# Altium PCB LM35.PcbDoc
Units mm, origin at the board's own origin, x right, y up, seen from the top; angles counter-clockwise.
Board outline 31.95 x 23.94 mm, 2 copper layers (Top Layer, Bottom Layer); 8 components, 4 nets, 14 pads, 48 vias.
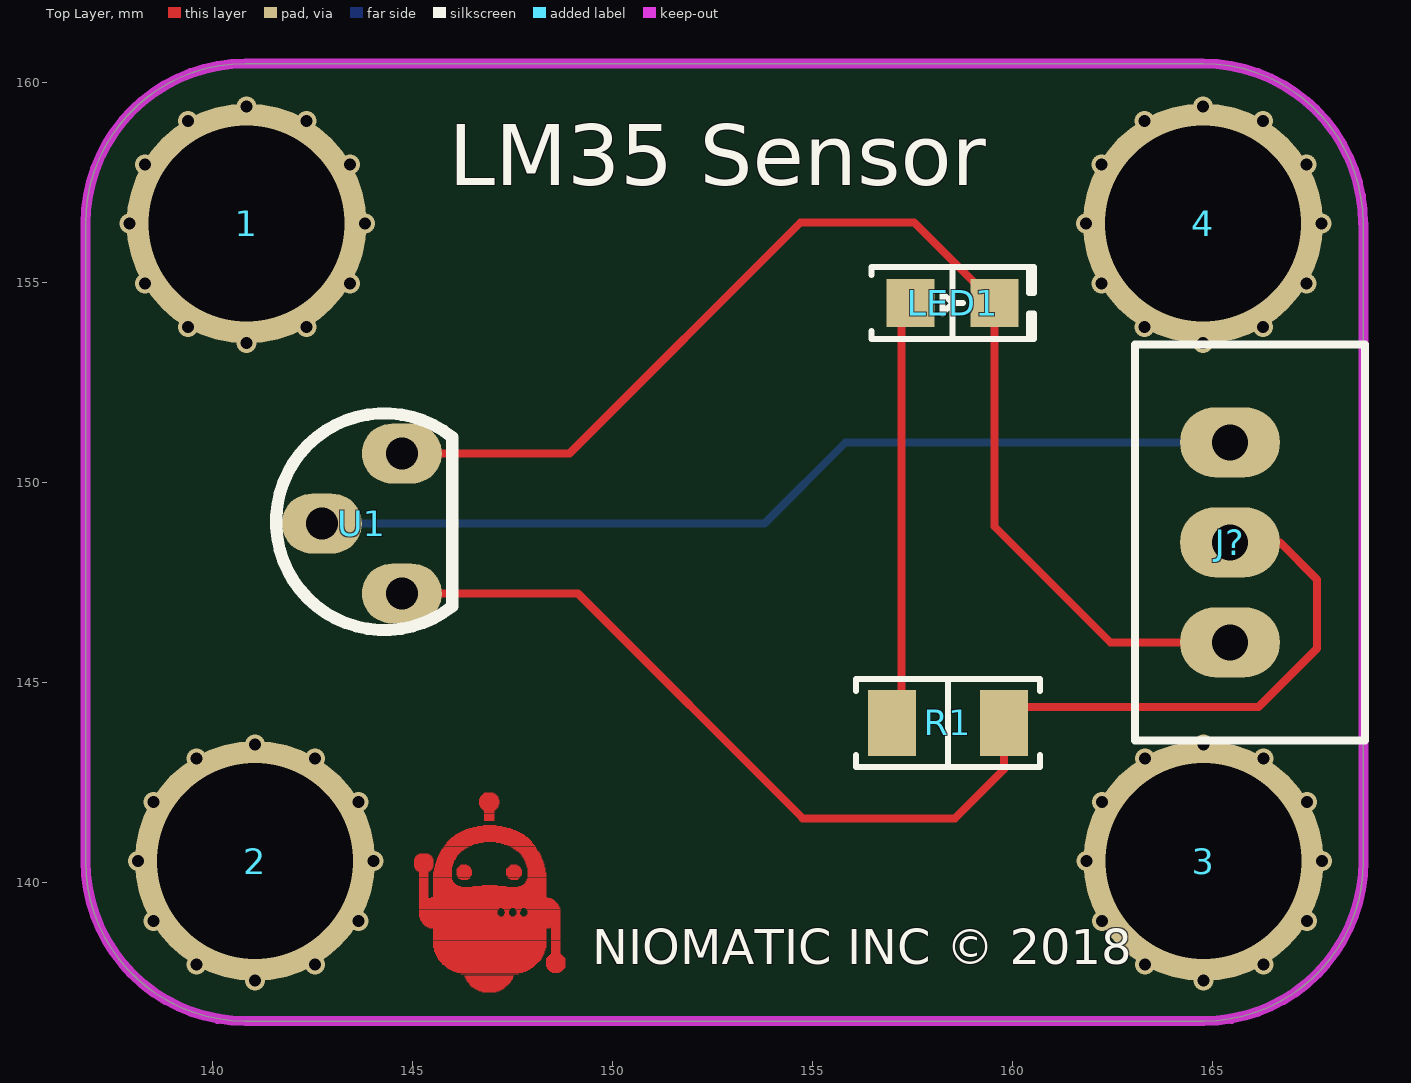
[diagram p0: Top Layer view]
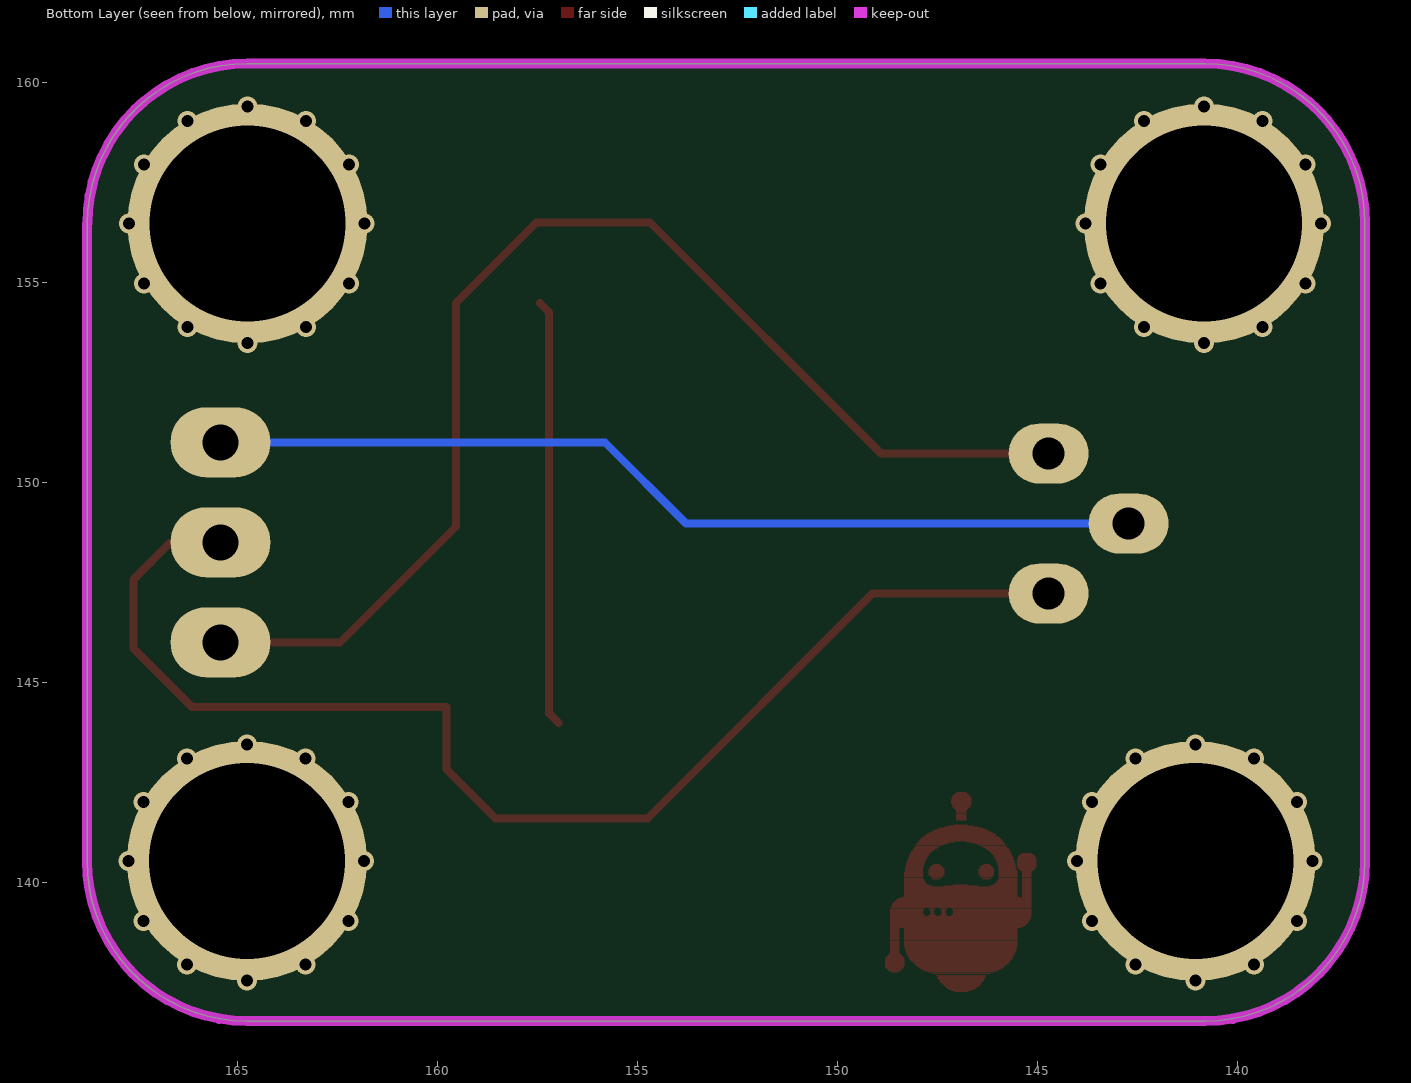
[diagram p1: Bottom Layer view, seen from below]
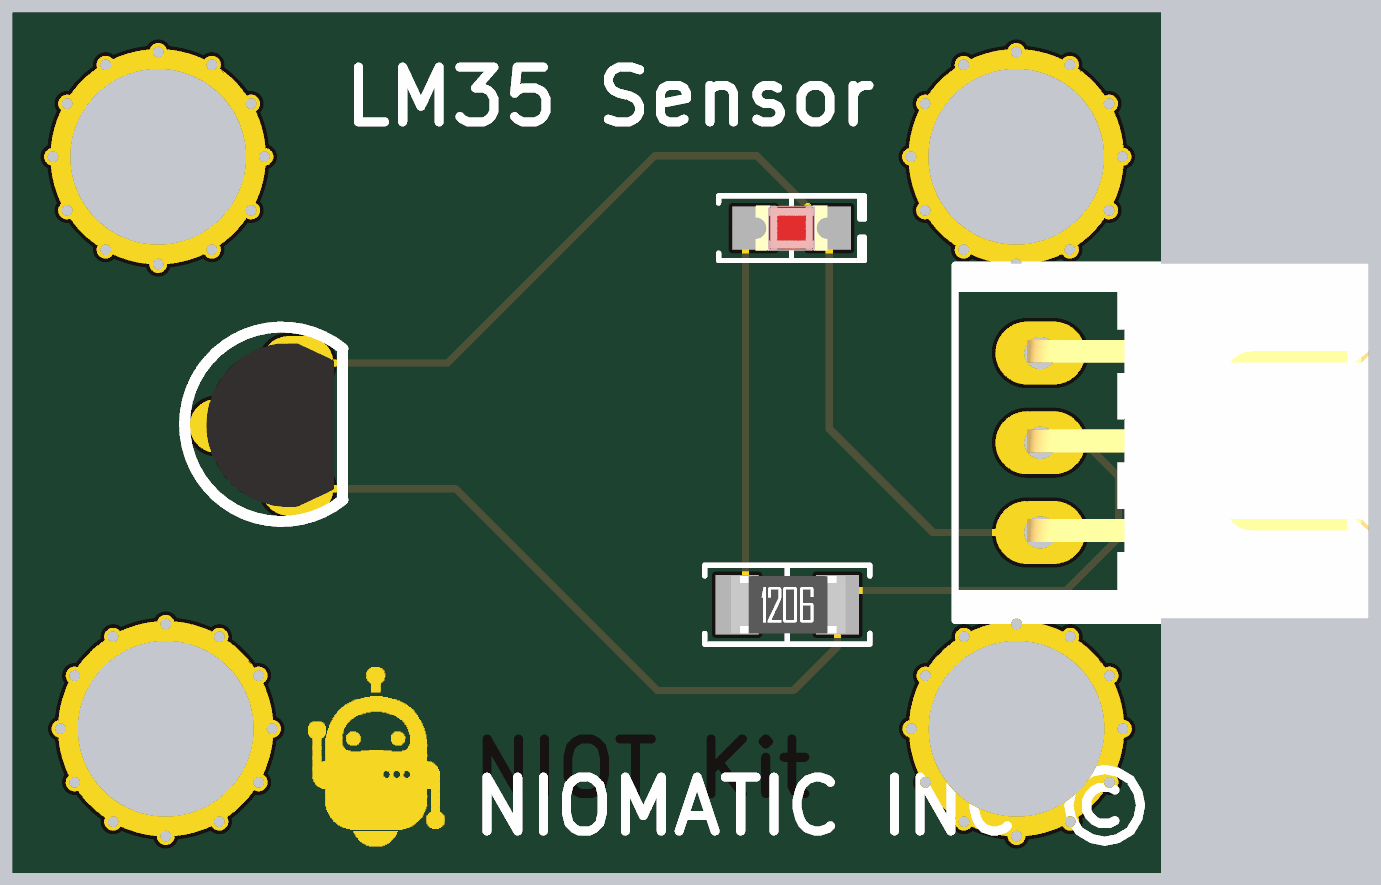
[diagram p2: 3D render of the assembled board from above, using the file's embedded part models]

## Layer stack, top to bottom
Top Solder: solder mask 0.0102, Solder Resist, Dk 3.5
Top Layer: signal copper 0.0356
Dielectric 1: dielectric 0.32, FR-4, Dk 4.8
Bottom Layer: signal copper 0.0356
Bottom Solder: solder mask 0.0102, Solder Resist, Dk 3.5

## Board outline
136.821,140.53 ccw(c140.821,140.53) 140.821,136.53 164.77,136.53 ccw(c164.77,140.53) 168.77,140.53 168.77,156.47 168.761,156.47 ccw(c164.761,156.47) 164.761,160.47 140.821,160.47 ccw(c140.821,156.47) 136.821,156.47 136.821,156.45

## Design rules (kind name [scope] priority, off if disabled: settings)
Clearance [All] p1: gap=0.254 ignorepadtopadclearanceinfootprint=FALSE except(0: Arc-Hole Track-Hole SMDPad-Hole THPad-Hole Via-Hole Fill-Hole Poly-Hole Region-Hole Text-Hole)
PolygonConnect [All] p1: connectstyle=Relief reliefconductorwidth=0.254 reliefentries=4 polygonreliefangle="90 Angle" airgapwidth=0.254
RoomDefinition LM35 [InComponentClass('LM35')] p1: confinementstyle=ConfineIn formatcopy=TRUE lockcomponents=FALSE outline 178.943,26.924 198.247,26.924 198.247,44.577 178.943,44.577
RoutingVias [All] p1: holewidth=0.2 width=0.5 viastyle="Through Hole" minholewidth=0.2 minwidth=0.5 maxholewidth=0.2 maxwidth=0.5
SolderMaskExpansion [All] p1: expansion=0.102
Width [All] p1: maxlimit=0.2 minlimit=0.2 preferedwidth=0.2
30 further rules are at their usual default settings.

## Components (designator, comment, footprint, x,y, rotation, side; value= is the part's Value field where it differs from the comment)
1 "Lego" "Lego Hole" 140.85,156.47 r90 top
2 "Lego" "Lego Hole" 141.06,140.53 r90 top
3 "Lego" "Lego Hole" 164.771,140.53 r90 top
4 "Lego" "Lego Hole" 164.761,156.47 r90 top
J? "Header" "JST XH B3B-XH-A - RIGHT" 165.433,148.5 r90 top
LED1 "RED" "LED 0805/2012 RED" 158.5,154.48 r0 top value=Green
R1 "1K" "RES 1206/3216" 158.382,143.987 r0 top
U1 "LM35" LM35 144.48,147.72 r180 top

## Footprints (in the part's own frame and the unit in brackets; to place one, negate y for a bottom-side part, rotate by r counter-clockwise, add the part's x,y. Pads: shape width x height; smd on the part's side, far side on the other; paste and mask are expansions set on the pad)
"JST XH B3B-XH-A - RIGHT" [mm]
  oval 1.75x2.5 hole 0.9: 1(-2.5,0) 2(0,0) 3(2.5,0)
  silkscreen extent -4.95,-3.38 4.95,2.38, body extent -4.9,-9.15 5,2.35, height 6.1
"LED 0805/2012 RED" [mm] "Chip Diode, 2-Leads, Body 2.00x1.25mm, IPC Medium Density"
  rect 1.2x1.2 smd: 1(-1.05,0) 2(1.05,0)
  silkscreen extent -2.03,-0.9 2.03,0.9, body extent -1,-0.62 1,0.63, height 0.9
"Lego Hole" [mm]
  round 6 hole 4.9: 0(0,0)
LM35 [mm]
  oval 2x1.5 hole 0.8: 1(-0.25,0.5) 2(1.75,-1.25) 3(-0.25,-3)
  silkscreen extent -1.52,-4 2.89,1.41, body extent -1.27,-3.56 2.29,1.02, height 6.18
"RES 1206/3216" [mm] "Chip Resistor, 2-Leads, Body 3.13x1.55mm, IPC Medium Density"
  rect 1.2x1.65 smd: 1(-1.4,0) 2(1.4,0)
  silkscreen extent -2.3,-1.1 2.3,1.1, body extent -1.57,-0.8 1.62,0.8, height 0.6

## Part data
J?: library part "3 Pin"
LED1: library part LED, "Chip LED"
R1: library part Resistor, "SMT Resistor"
U1: "LM35 Temperature Sensor", ComponentLinkURL=www.picpars.com, Designer="Seyed Mohsen Ghasemain", E-mail=picpars@gmail.com

## Via types
v1: diameter 0.5, hole 0.3, Top Layer to Bottom Layer, 48 vias

## Nets (pads, with @x,y where several pads share a name; then routed paths per layer and width w, separated by ;. In a path a pad name is that pad's centre, name@x,y a point inside that pad or via, vN(x,y) a via of type N, cw(c..) or ccw(c..) an arc to the next point about the centre after c; other vN are vias at no path point)
AOUT: J?.3 U1.2 | length 23.5
  Bottom Layer w0.2: U1.2 153.796,148.97 155.826,151 J?.3
GND: J?.1 LED1.2 U1.3 | length 30.7
  Top Layer w0.2: U1.3 148.92,150.72 154.7,156.5 157.53,156.5 LED1.2 159.55,148.89 162.44,146 J?.1
NetLED1_1: LED1.1 R1.1 | length 10.7
  Top Layer w0.2: R1.1 157.22,144.225 157.22,154.25 LED1.1
VCC: J?.2 R1.2 U1.1 | length 32.2
  Top Layer w0.2: U1.1 149.13,147.22 154.75,141.6 158.558,141.6 159.782,142.824 R1.2 159.782,144.38 166.148,144.38 167.61,145.842 167.61,147.57 166.68,148.5 J?.2
pads on no net: 1.0 2.0 3.0 4.0
copper on no net: | length 380
  Top Layer w0.025: 145.034,140.387 145.516,140.387 ; 145.034,140.412 145.516,140.412 ; 145.034,140.438 145.516,140.438 ; 145.034,140.463 145.516,140.463 ; 145.034,140.489 145.516,140.489 ; 145.034,140.514 145.516,140.514 ; 145.034,140.539 145.516,140.539 ; 145.034,140.565 145.516,140.565 ; 145.034,140.59 145.516,140.59 ; 145.059,140.336 145.491,140.336 ; 145.059,140.362 145.491,140.362 ; 145.059,140.616 145.491,140.616 ; 145.059,140.641 145.491,140.641 ; 145.085,140.311 145.466,140.311 ; 145.085,140.666 145.466,140.666 ; 145.11,140.285 145.44,140.285 ; 145.11,140.692 145.44,140.692 ; 145.161,139.142 148.691,139.142 ; 145.161,139.168 147.167,139.168 ; 145.161,139.193 147.142,139.193 ; 145.161,139.219 147.117,139.219 ; 145.161,139.244 147.117,139.244 ; 145.161,139.269 147.117,139.269 ; 145.161,139.295 147.117,139.295 ; 145.161,139.32 147.142,139.32 ; 145.161,139.346 147.167,139.346 ; 145.161,139.371 148.666,139.371 ; 145.161,139.396 148.666,139.396 ; 145.161,139.422 148.641,139.422 ; 145.161,139.447 148.641,139.447 ; 145.161,139.473 148.615,139.473 ; 145.161,139.498 148.59,139.498 ; 145.161,139.523 148.564,139.523 ; 145.161,139.549 148.539,139.549 ; 145.161,139.574 148.514,139.574 ; 145.161,139.6 148.463,139.6 ; 145.161,139.625 145.389,139.625 ; 145.161,139.65 145.389,139.65 ; 145.161,139.676 145.389,139.676 ; 145.161,139.701 145.389,139.701 ; 145.161,139.727 145.389,139.727 ; 145.161,139.752 145.389,139.752 ; 145.161,139.777 145.389,139.777 ; 145.161,139.803 145.389,139.803 ; 145.161,139.828 145.389,139.828 ; 145.161,139.854 145.389,139.854 ; 145.161,139.879 145.389,139.879 ; 145.161,139.904 145.389,139.904 ; 145.161,139.93 145.389,139.93 ; 145.161,139.955 145.389,139.955 ; 145.161,139.981 145.389,139.981 ; 145.161,140.006 145.389,140.006 ; 145.161,140.031 145.389,140.031 ; 145.161,140.057 145.389,140.057 ; 145.161,140.082 145.389,140.082 ; 145.161,140.108 145.389,140.108 ; 145.161,140.133 145.389,140.133 ; 145.161,140.158 145.389,140.158 ; 145.161,140.184 145.389,140.184 ; 145.161,140.209 145.389,140.209 ; 145.161,140.235 145.389,140.235 ; 145.161,140.26 145.389,140.26 ; 145.161,140.717 145.389,140.717 ; 145.186,139.066 148.691,139.066 ; 145.186,139.092 148.691,139.092 ; 145.186,139.117 148.691,139.117 ; 145.212,139.041 148.691,139.041 ; 145.237,138.99 148.691,138.99 ; 145.237,139.015 148.691,139.015 ; 145.262,138.965 148.691,138.965 ; 145.288,138.939 148.691,138.939 ; 145.313,138.914 148.691,138.914 ; 145.364,138.888 148.691,138.888 ; 145.415,138.863 148.437,138.863 ; 145.466,139.625 148.361,139.625 ; 145.516,138.38 148.336,138.38 ; 145.516,138.406 148.336,138.406 ; 145.516,138.431 148.336,138.431 ; 145.516,138.457 148.336,138.457 ; 145.516,138.482 148.336,138.482 ; 145.516,138.507 148.336,138.507 ; 145.516,138.533 148.336,138.533 ; 145.516,138.558 148.336,138.558 ; 145.516,138.584 148.336,138.584 ; 145.516,138.609 148.336,138.609 ; 145.516,138.634 148.336,138.634 ; 145.516,138.66 148.336,138.66 ; 145.516,138.685 148.336,138.685 ; 145.516,138.711 148.336,138.711 ; 145.516,138.736 148.336,138.736 ; 145.516,138.761 148.336,138.761 ; 145.516,138.787 148.336,138.787 ; 145.516,138.812 148.336,138.812 ; 145.516,138.838 148.336,138.838 ; 145.516,139.65 148.336,139.65 ; 145.516,139.676 148.336,139.676 ; 145.516,139.701 148.336,139.701 ; 145.516,139.727 148.336,139.727 ; 145.516,139.752 148.336,139.752 ; 145.516,139.777 148.336,139.777 ; 145.516,139.803 148.336,139.803 ; 145.516,139.828 148.336,139.828 ; 145.516,139.854 148.336,139.854 ; 145.516,139.879 148.336,139.879 ; 145.516,139.904 146.202,139.904 ; 145.516,139.93 146.126,139.93 ; 145.516,139.955 146.075,139.955 ; 145.516,139.981 146.05,139.981 ; 145.516,140.006 146.024,140.006 ; 145.516,140.031 145.999,140.031 ; 145.516,140.057 145.999,140.057 ; 145.516,140.082 145.974,140.082 ; 145.516,140.108 145.974,140.108 ; 145.516,140.133 145.974,140.133 ; 145.516,140.158 145.974,140.158 ; 145.516,140.184 145.974,140.184 ; 145.516,140.209 145.974,140.209 ; 145.516,140.235 145.974,140.235 ; 145.516,140.26 145.974,140.26 ; 145.542,138.279 148.285,138.279 ; 145.542,138.304 148.31,138.304 ; 145.542,138.33 148.31,138.33 ; 145.542,138.355 148.31,138.355 ; 145.542,140.285 145.974,140.285 ; 145.542,140.311 145.974,140.311 ; 145.542,140.336 145.974,140.336 ; 145.542,140.362 145.974,140.362 ; 145.567,138.228 148.285,138.228 ; 145.567,138.253 148.285,138.253 ; 145.567,140.387 145.974,140.387 ; 145.567,140.412 145.999,140.412 ; 145.567,140.438 145.999,140.438 ; 145.567,140.463 145.999,140.463 ; 145.593,138.177 148.26,138.177 ; 145.593,138.203 148.26,138.203 ; 145.593,140.489 146.024,140.489 ; 145.593,140.514 146.024,140.514 ; 145.593,140.539 146.024,140.539 ; 145.618,138.126 148.234,138.126 ; 145.618,138.152 148.234,138.152 ; 145.618,140.565 146.05,140.565 ; 145.618,140.59 146.075,140.59 ; 145.618,140.616 146.075,140.616 ; 145.643,138.076 148.209,138.076 ; 145.643,138.101 148.209,138.101 ; 145.643,140.641 146.101,140.641 ; 145.643,140.666 146.101,140.666 ; 145.669,138.05 148.183,138.05 ; 145.669,140.692 146.126,140.692 ; 145.669,140.717 146.151,140.717 ; 145.694,138.025 148.158,138.025 ; 145.694,140.743 146.177,140.743 ; 145.694,140.768 146.202,140.768 ; 145.72,137.999 148.133,137.999 ; 145.72,140.793 146.228,140.793 ; 145.72,140.819 146.278,140.819 ; 145.745,137.949 148.082,137.949 ; 145.745,137.974 148.107,137.974 ; 145.745,140.844 146.304,140.844 ; 145.77,140.87 146.355,140.87 ; 145.77,140.895 146.405,140.895 ; 145.796,137.923 148.056,137.923 ; 145.796,140.92 146.482,140.92 ; 145.821,137.898 148.031,137.898 ; 145.821,140.946 146.532,140.946 ; 145.847,137.872 148.006,137.872 ; 145.847,140.971 146.634,140.971 ; 145.847,140.997 146.761,140.997 ; 145.872,137.847 147.955,137.847 ; 145.872,141.022 147.98,141.022 ; 145.897,141.047 147.955,141.047 ; 145.923,137.822 147.929,137.822 ; 145.923,141.073 147.929,141.073 ; 145.948,141.098 147.904,141.098 ; 145.974,137.796 147.879,137.796 ; 145.974,141.124 147.879,141.124 ; 146.024,137.771 147.828,137.771 ; 146.024,141.149 147.828,141.149 ; 146.05,141.174 147.802,141.174 ; 146.075,141.2 147.777,141.2 ; 146.101,137.745 147.752,137.745 ; 146.101,140.184 146.482,140.184 ; 146.101,140.209 146.482,140.209 ; 146.101,140.235 146.482,140.235 ; 146.101,140.26 146.482,140.26 ; 146.101,140.285 146.482,140.285 ; 146.101,140.311 146.482,140.311 ; 146.101,140.336 146.456,140.336 ; 146.126,140.133 146.431,140.133 ; 146.126,140.158 146.456,140.158 ; 146.126,140.362 146.456,140.362 ; 146.126,141.225 147.726,141.225 ; 146.151,140.108 146.431,140.108 ; 146.151,140.387 146.431,140.387 ; 146.177,140.412 146.405,140.412 ; 146.177,141.251 147.675,141.251 ; 146.202,137.72 147.65,137.72 ; 146.202,140.082 146.38,140.082 ; 146.202,140.438 146.355,140.438 ; 146.228,141.276 147.625,141.276 ; 146.278,141.301 147.574,141.301 ; 146.304,137.644 147.498,137.644 ; 146.304,137.669 147.523,137.669 ; 146.329,137.593 147.498,137.593 ; 146.329,137.618 147.498,137.618 ; 146.329,141.327 147.498,141.327 ; 146.355,137.542 147.447,137.542 ; 146.355,137.568 147.472,137.568 ; 146.38,137.517 147.447,137.517 ; 146.405,137.491 147.421,137.491 ; 146.405,141.352 147.447,141.352 ; 146.431,137.441 147.371,137.441 ; 146.431,137.466 147.396,137.466 ; 146.456,137.415 147.345,137.415 ; 146.482,137.39 147.32,137.39 ; 146.507,139.904 147.345,139.904 ; 146.507,141.378 147.345,141.378 ; 146.532,137.364 147.294,137.364 ; 146.558,137.339 147.269,137.339 ; 146.609,137.314 147.218,137.314 ; 146.609,141.403 147.244,141.403 ; 146.659,137.288 147.167,137.288 ; 146.659,141.936 147.142,141.936 ; 146.659,141.962 147.167,141.962 ; 146.659,141.987 147.167,141.987 ; 146.659,142.013 147.167,142.013 ; 146.659,142.038 147.167,142.038 ; 146.659,142.063 147.167,142.063 ; 146.659,142.089 147.142,142.089 ; 146.685,141.886 147.142,141.886 ; 146.685,141.911 147.142,141.911 ; 146.685,142.114 147.142,142.114 ; 146.685,142.14 147.142,142.14 ; 146.71,141.86 147.117,141.86 ; 146.71,142.165 147.117,142.165 ; 146.736,137.263 147.091,137.263 ; 146.736,139.93 147.117,139.93 ; 146.736,141.835 147.091,141.835 ; 146.736,142.19 147.091,142.19 ; 146.761,141.428 147.091,141.428 ; 146.761,141.809 147.066,141.809 ; 146.761,142.216 147.066,142.216 ; 146.786,141.555 147.04,141.555 ; 146.786,141.581 147.04,141.581 ; 146.786,141.606 147.04,141.606 ; 146.786,141.632 147.04,141.632 ; 146.786,141.657 147.04,141.657 ; 146.786,141.682 147.04,141.682 ; 146.786,141.708 147.04,141.708 ; 146.786,141.733 147.04,141.733 ; 146.786,141.759 147.04,141.759 ; 146.786,141.784 147.04,141.784 ; 146.786,142.241 147.015,142.241 ; 147.091,140.997 147.98,140.997 ; 147.218,140.971 148.006,140.971 ; 147.244,139.346 147.447,139.346 ; 147.269,139.168 147.447,139.168 ; 147.294,139.193 147.421,139.193 ; 147.294,139.219 147.396,139.219 ; 147.294,139.295 147.396,139.295 ; 147.294,139.32 147.421,139.32 ; 147.294,140.946 148.031,140.946 ; 147.32,139.244 147.396,139.244 ; 147.32,139.269 147.396,139.269 ; 147.345,140.184 147.726,140.184 ; 147.345,140.209 147.726,140.209 ; 147.345,140.235 147.726,140.235 ; 147.345,140.26 147.726,140.26 ; 147.345,140.285 147.726,140.285 ; 147.345,140.311 147.726,140.311 ; 147.345,140.336 147.701,140.336 ; 147.371,140.133 147.675,140.133 ; 147.371,140.158 147.701,140.158 ; 147.371,140.362 147.701,140.362 ; 147.371,140.92 148.056,140.92 ; 147.396,140.108 147.65,140.108 ; 147.396,140.387 147.675,140.387 ; 147.421,140.412 147.65,140.412 ; 147.447,140.082 147.625,140.082 ; 147.447,140.438 147.599,140.438 ; 147.447,140.895 148.082,140.895 ; 147.498,140.87 148.082,140.87 ; 147.523,140.844 148.107,140.844 ; 147.548,139.168 147.726,139.168 ; 147.548,139.346 147.726,139.346 ; 147.574,139.193 147.701,139.193 ; 147.574,139.32 147.701,139.32 ; 147.574,140.819 148.107,140.819 ; 147.599,139.219 147.675,139.219 ; 147.599,139.244 147.675,139.244 ; 147.599,139.269 147.675,139.269 ; 147.599,139.295 147.701,139.295 ; 147.599,140.793 148.133,140.793 ; 147.65,139.904 148.336,139.904 ; 147.65,140.768 148.158,140.768 ; 147.675,140.743 148.158,140.743 ; 147.701,140.717 148.183,140.717 ; 147.726,139.93 148.336,139.93 ; 147.726,140.666 148.209,140.666 ; 147.726,140.692 148.183,140.692 ; 147.752,140.641 148.209,140.641 ; 147.777,139.955 148.336,139.955 ; 147.777,140.59 148.234,140.59 ; 147.777,140.616 148.209,140.616 ; 147.802,139.981 148.336,139.981 ; 147.802,140.539 148.26,140.539 ; 147.802,140.565 148.234,140.565 ; 147.828,139.168 148.691,139.168 ; 147.828,139.346 148.691,139.346 ; 147.828,140.006 148.336,140.006 ; 147.828,140.031 148.336,140.031 ; 147.828,140.463 148.285,140.463 ; 147.828,140.489 148.26,140.489 ; 147.828,140.514 148.26,140.514 ; 147.853,139.193 148.691,139.193 ; 147.853,139.32 148.691,139.32 ; 147.853,140.057 148.336,140.057 ; 147.853,140.082 148.336,140.082 ; 147.853,140.387 148.285,140.387 ; 147.853,140.412 148.285,140.412 ; 147.853,140.438 148.285,140.438 ; 147.879,139.219 148.691,139.219 ; 147.879,139.244 148.691,139.244 ; 147.879,139.269 148.691,139.269 ; 147.879,139.295 148.691,139.295 ; 147.879,140.108 148.336,140.108 ; 147.879,140.133 148.336,140.133 ; 147.879,140.158 148.336,140.158 ; 147.879,140.184 148.336,140.184 ; 147.879,140.209 148.336,140.209 ; 147.879,140.235 148.336,140.235 ; 147.879,140.26 148.31,140.26 ; 147.879,140.285 148.31,140.285 ; 147.879,140.311 148.31,140.311 ; 147.879,140.336 148.31,140.336 ; 147.879,140.362 148.31,140.362 ; 148.336,137.898 148.818,137.898 ; 148.336,137.923 148.818,137.923 ; 148.336,137.949 148.818,137.949 ; 148.336,137.974 148.818,137.974 ; 148.336,137.999 148.818,137.999 ; 148.336,138.025 148.818,138.025 ; 148.336,138.05 148.818,138.05 ; 148.336,138.076 148.818,138.076 ; 148.336,138.101 148.818,138.101 ; 148.361,137.847 148.793,137.847 ; 148.361,137.872 148.818,137.872 ; 148.361,138.126 148.793,138.126 ; 148.387,137.822 148.768,137.822 ; 148.387,138.152 148.768,138.152 ; 148.412,137.796 148.742,137.796 ; 148.412,138.177 148.742,138.177 ; 148.437,137.771 148.717,137.771 ; 148.437,138.203 148.717,138.203 ; 148.463,138.228 148.691,138.228 ; 148.463,138.253 148.691,138.253 ; 148.463,138.279 148.691,138.279 ; 148.463,138.304 148.691,138.304 ; 148.463,138.33 148.691,138.33 ; 148.463,138.355 148.691,138.355 ; 148.463,138.38 148.691,138.38 ; 148.463,138.406 148.691,138.406 ; 148.463,138.431 148.691,138.431 ; 148.463,138.457 148.691,138.457 ; 148.463,138.482 148.691,138.482 ; 148.463,138.507 148.691,138.507 ; 148.463,138.533 148.691,138.533 ; 148.463,138.558 148.691,138.558 ; 148.463,138.584 148.691,138.584 ; 148.463,138.609 148.691,138.609 ; 148.463,138.634 148.691,138.634 ; 148.463,138.66 148.691,138.66 ; 148.463,138.685 148.691,138.685 ; 148.463,138.711 148.691,138.711 ; 148.463,138.736 148.691,138.736 ; 148.463,138.761 148.691,138.761 ; 148.463,138.787 148.691,138.787 ; 148.463,138.812 148.691,138.812 ; 148.463,138.838 148.691,138.838 ; 148.463,138.863 148.691,138.863 ; 148.488,137.745 148.666,137.745
  other v1: 141.06,137.541 164.771,137.541 139.594,137.941 142.555,137.941 163.305,137.941 166.266,137.941 138.522,139.036 143.649,139.036 162.233,139.036 167.36,139.036 138.13,140.53 144.02,140.53 161.841,140.53 167.731,140.53 138.522,142.011 143.649,142.011 162.233,142.011 167.36,142.011 139.594,143.094 142.555,143.094 163.305,143.094 166.266,143.094 141.06,143.451 164.771,143.451 140.85,153.481 164.761,153.481 139.384,153.881 142.344,153.881 163.295,153.881 166.255,153.881 138.312,154.976 143.439,154.976 162.223,154.976 167.35,154.976 137.92,156.47 143.81,156.47 161.831,156.47 167.721,156.47 138.312,157.951 143.439,157.951 162.223,157.951 167.35,157.951 139.384,159.034 142.344,159.034 163.295,159.034 166.255,159.034 140.85,159.391 164.761,159.391

## Keep-outs
Keep-Out Layer:
  lines w0.254: 136.821,140.51 136.821,156.45 ; 136.821,140.53 ccw(c140.821,140.53) 140.821,136.53 164.77,136.53 ccw(c164.77,140.53) 168.77,140.53 168.77,156.47 ; 136.821,156.47 cw(c140.821,156.47) 140.821,160.47 164.761,160.47 cw(c164.761,156.47) 168.761,156.47

## Silkscreen, mask and mechanical layers (free items; w line width, h text height)
Top Overlay:
  text "LM35 Sensor" at 145.9,157.43 h1.52
  text "NIOMATIC INC © 2018" at 149.487,137.668 h1.5
Top Solder:
  text "NIOT Kit" at 149.487,138.708 h1.52